# Altium PCB QuadDeck.PcbDoc
Units mm, origin at the board's own origin, x right, y up, seen from the top; angles counter-clockwise.
Board outline 42.2 x 31.8 mm, 4 copper layers (Top Layer, VDD, GND, Bottom Layer), stack 0.604 mm thick; 31 components, 23 nets, 158 pads, 57 vias.
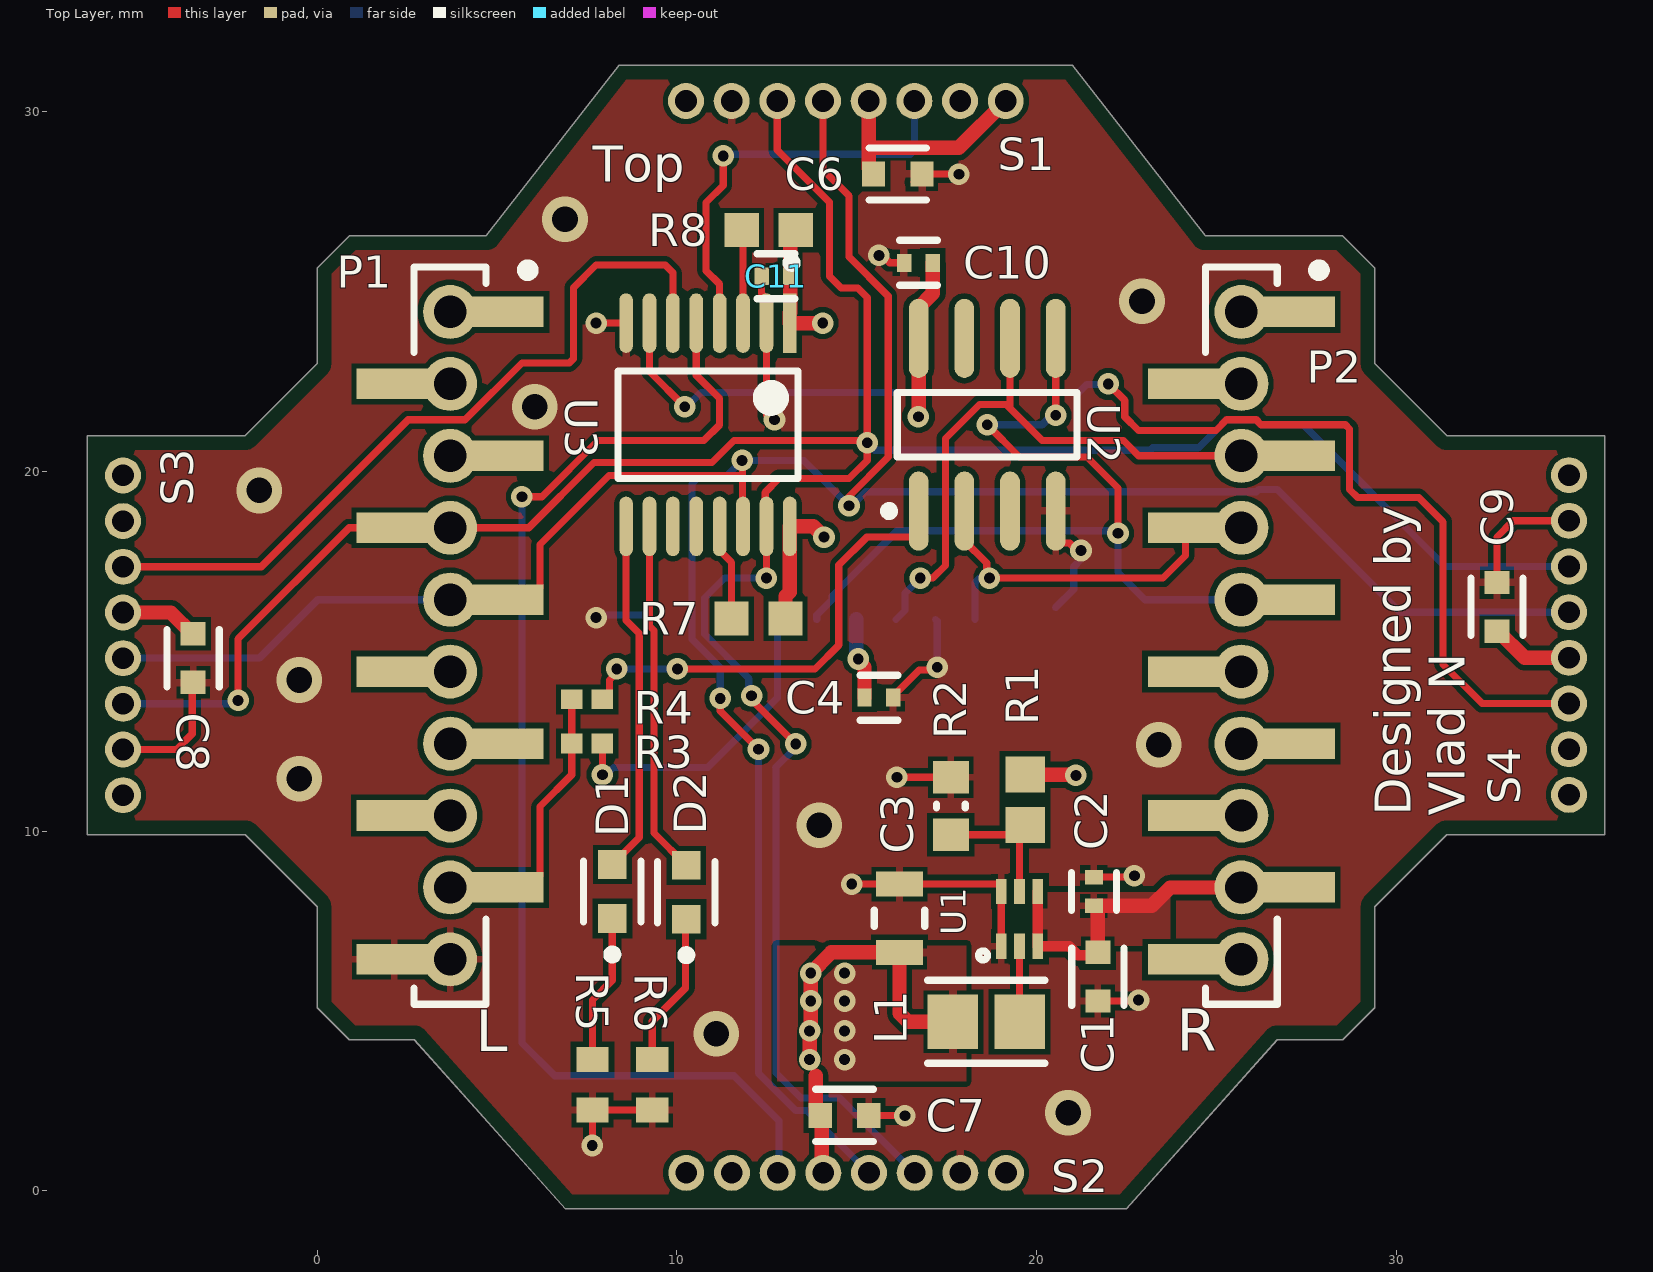
[diagram p0: Top Layer view]
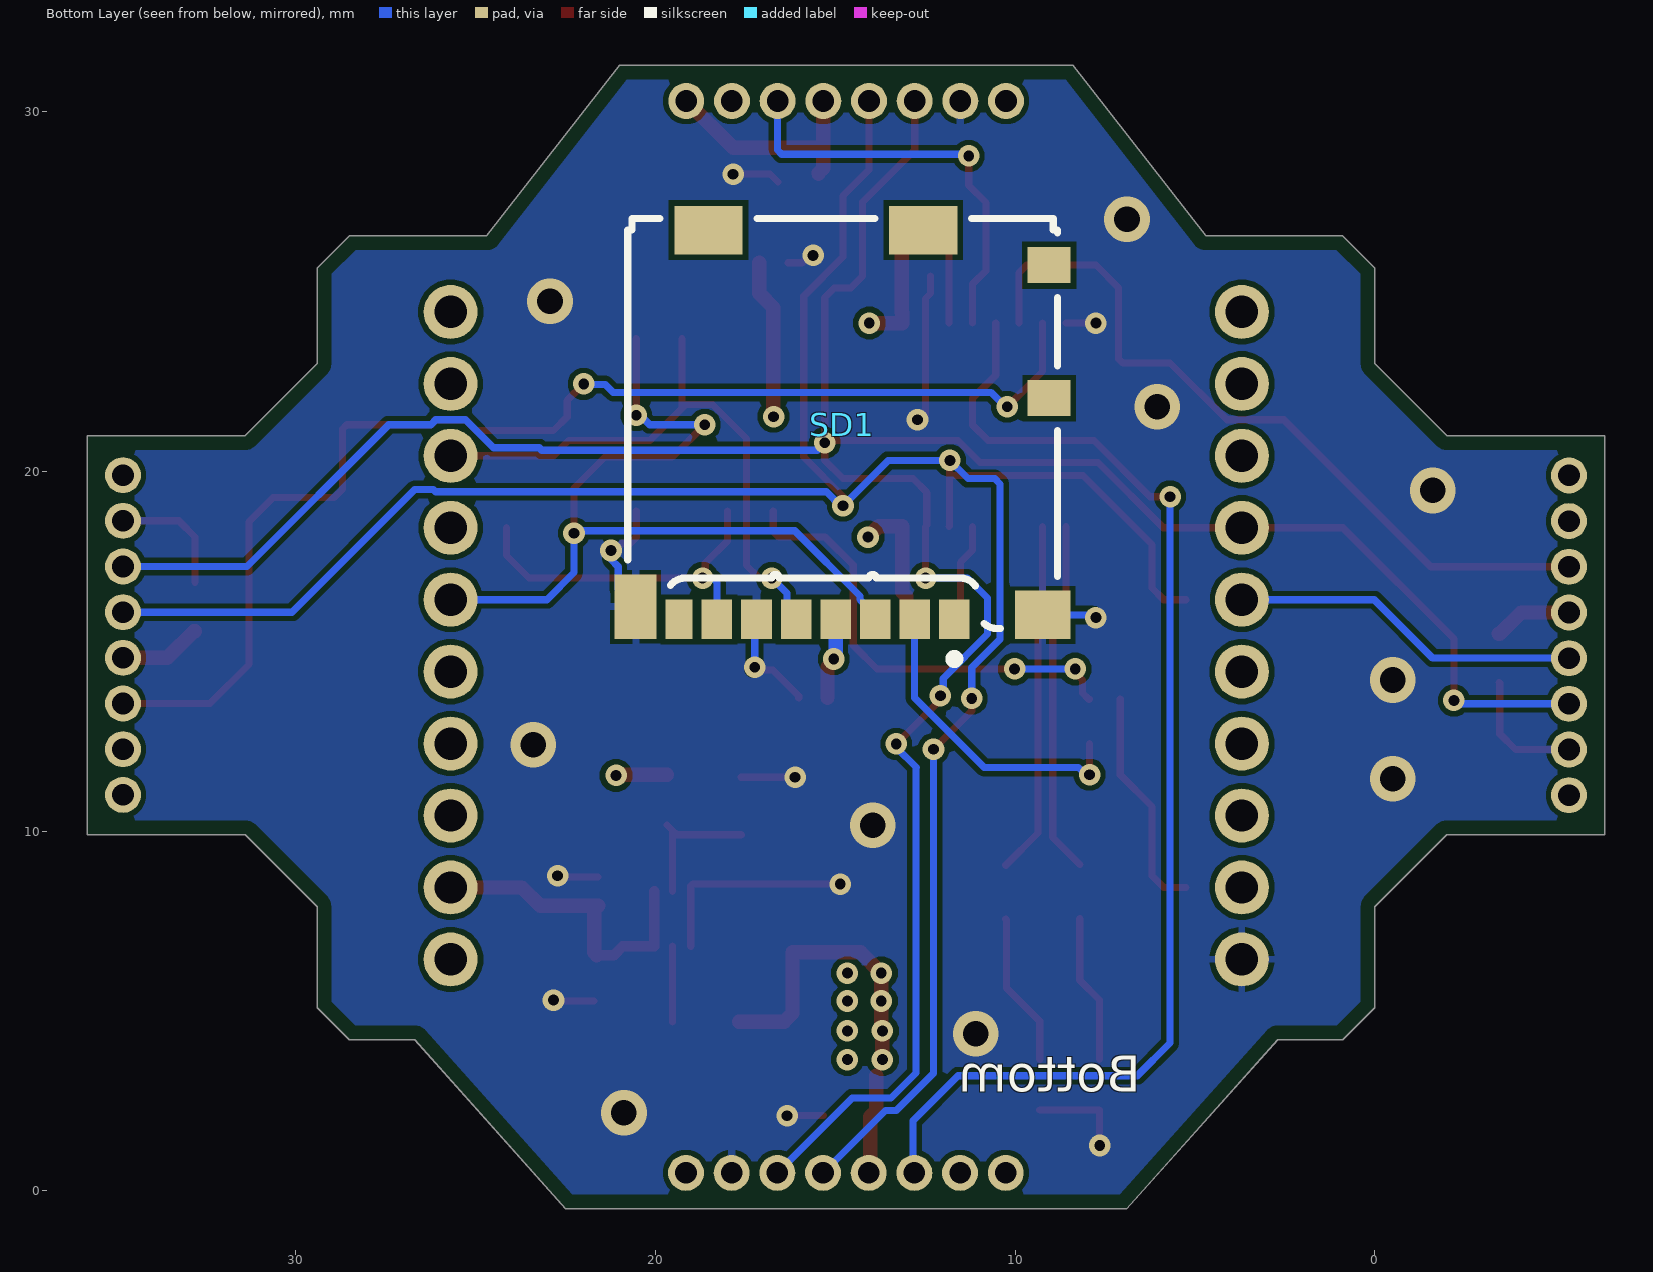
[diagram p1: Bottom Layer view, seen from below]
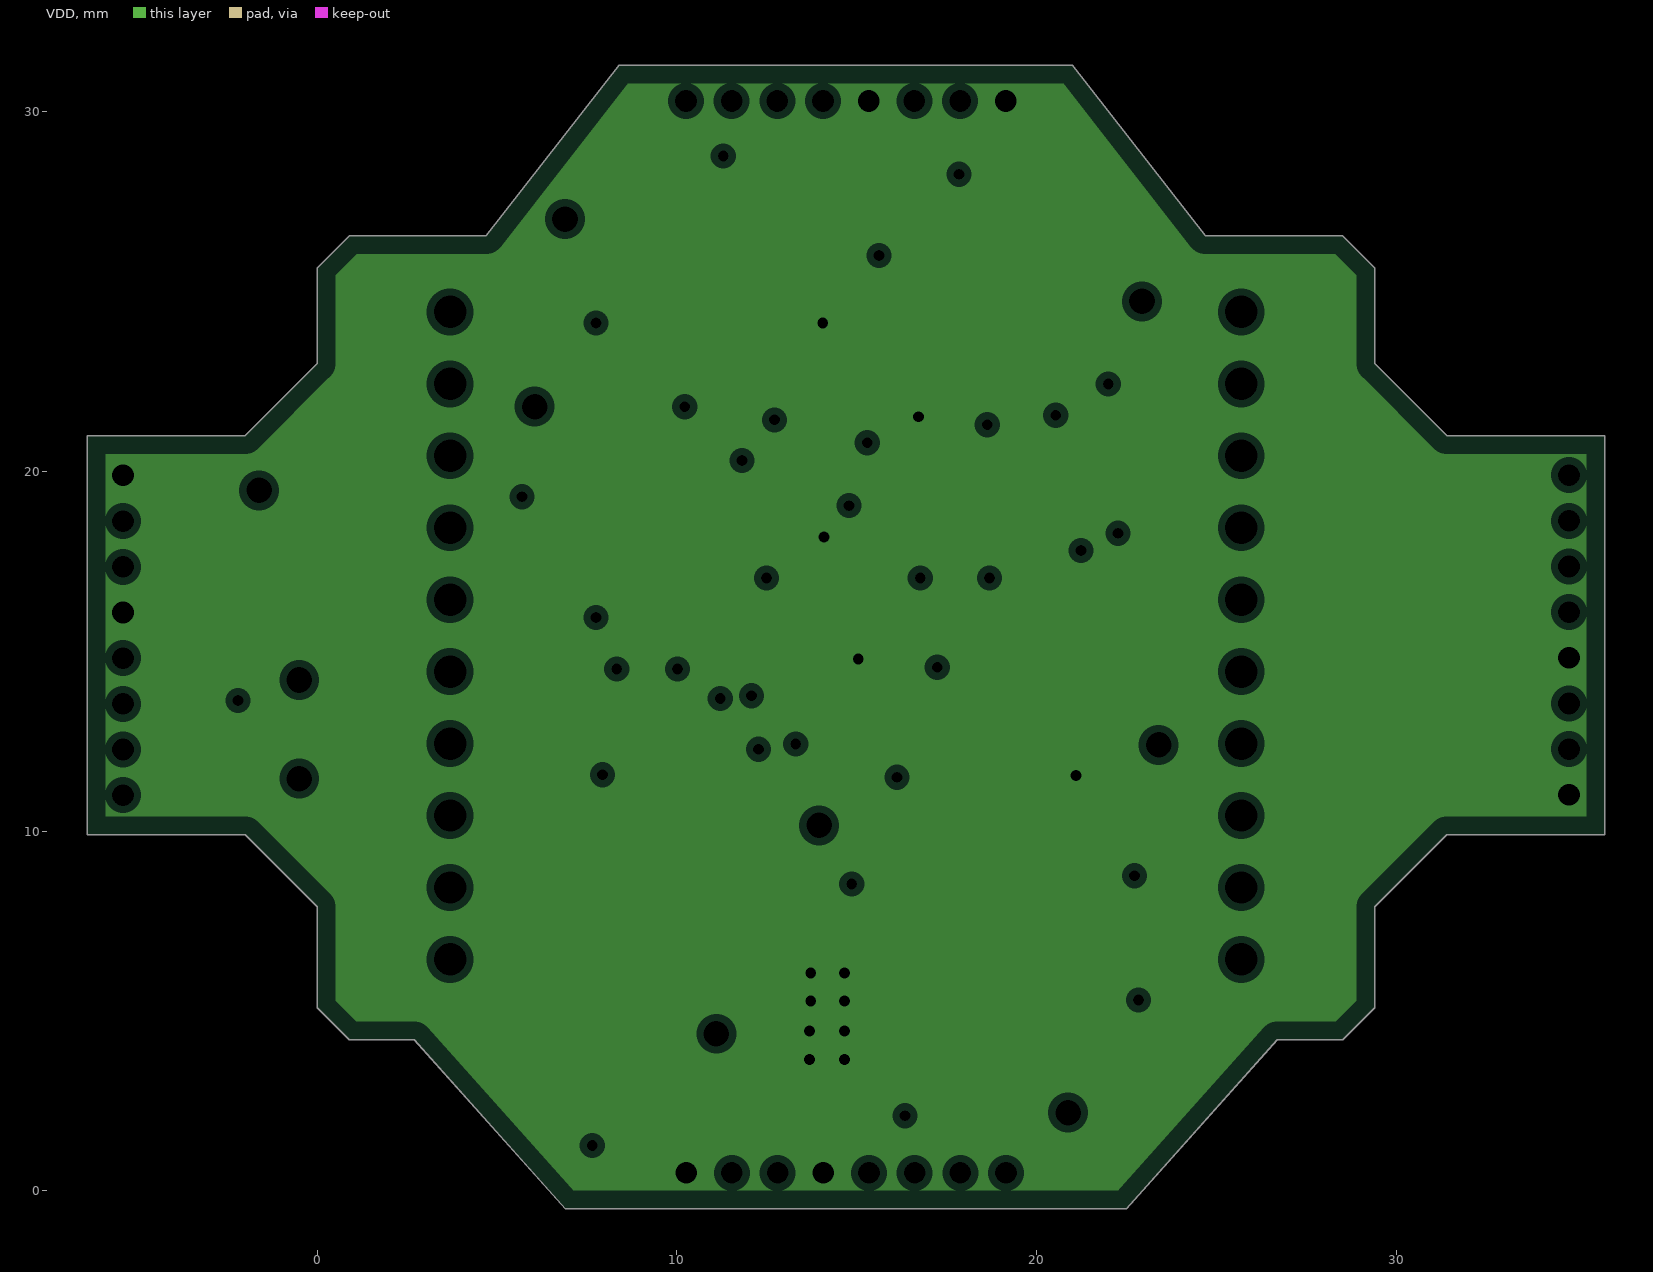
[diagram p2: VDD, clearances drawn from the general rule]
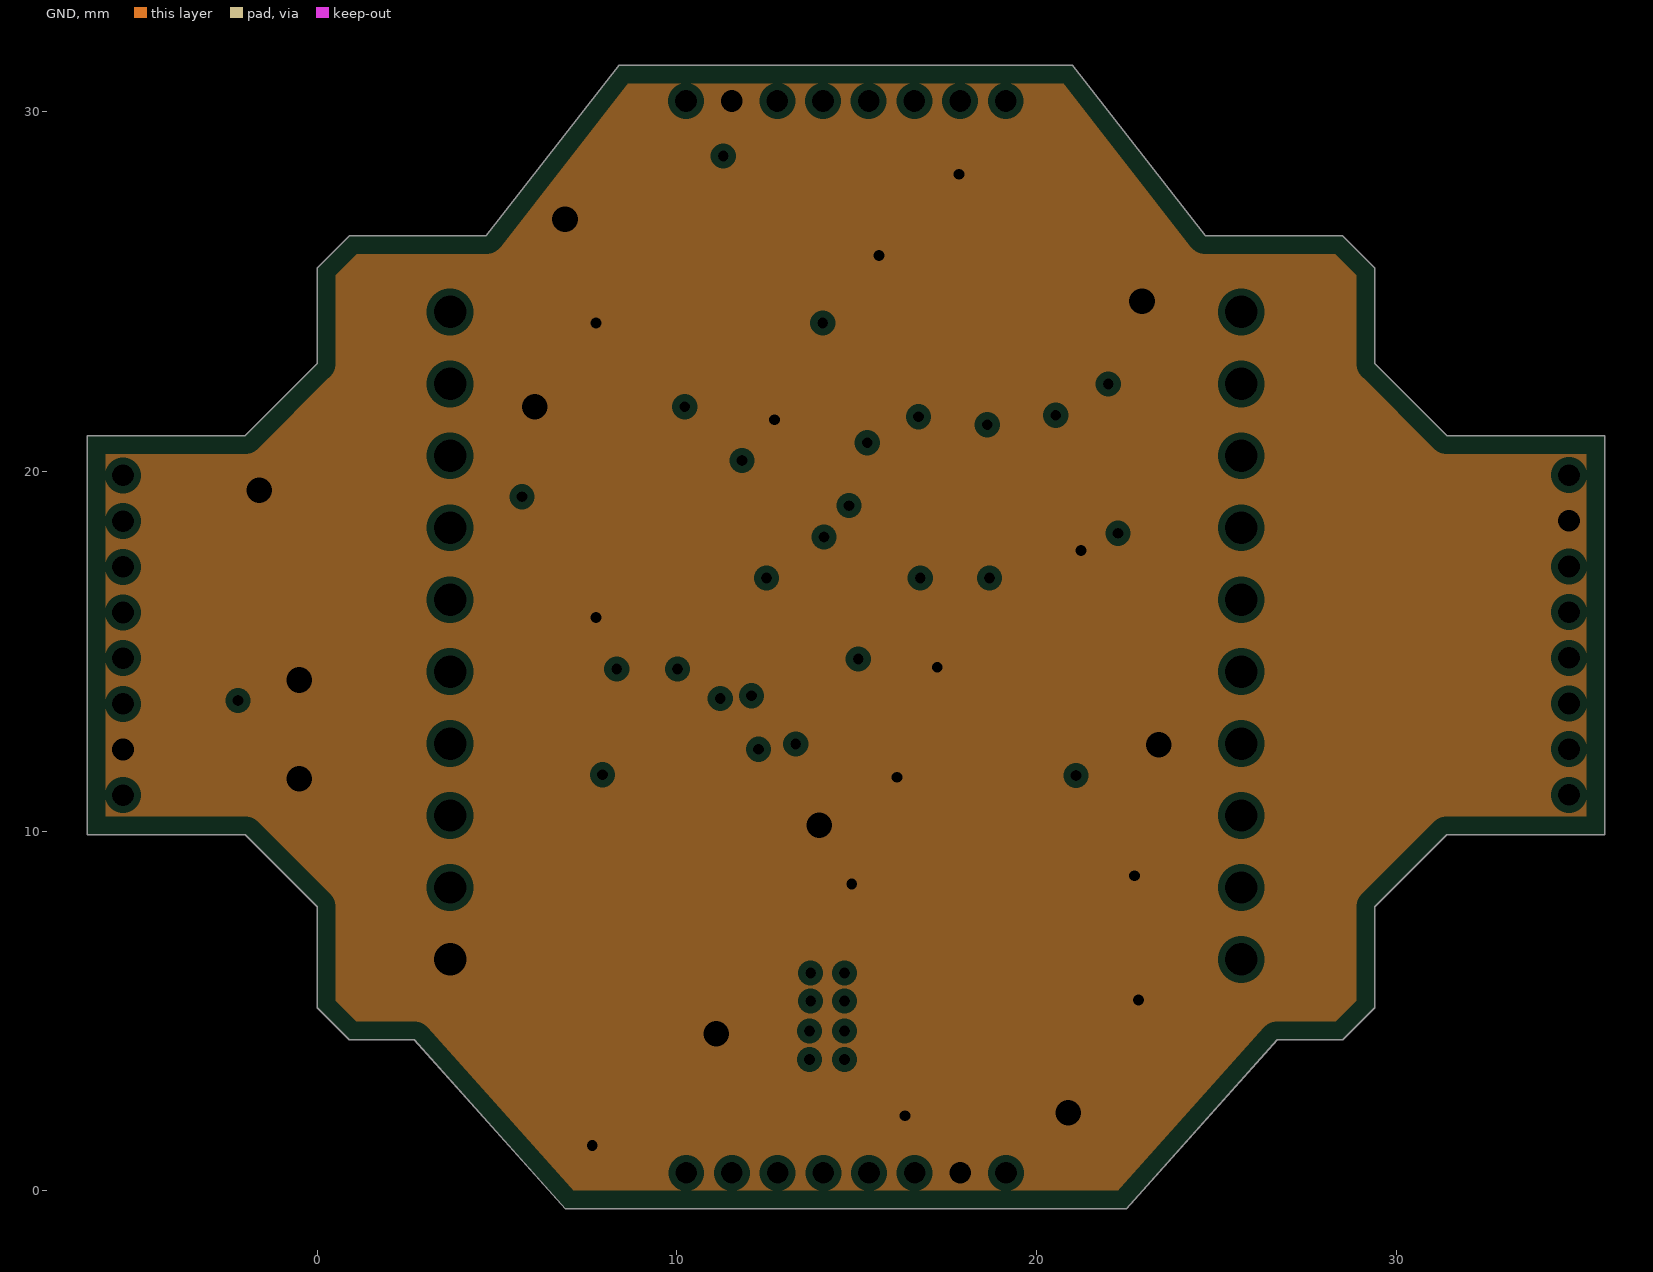
[diagram p3: GND, clearances drawn from the general rule]
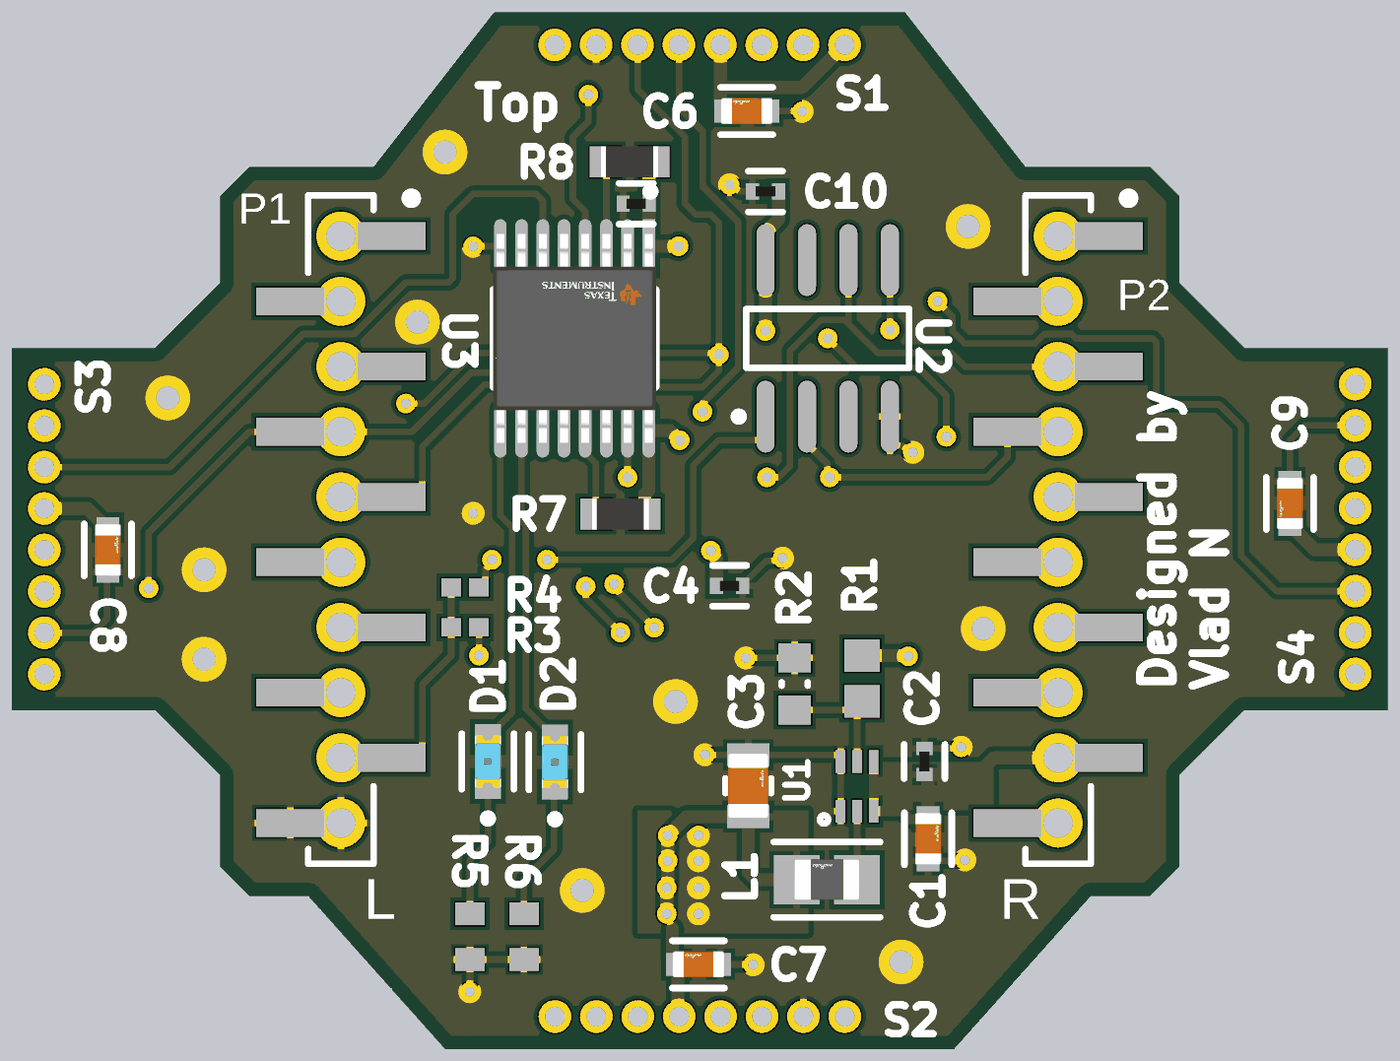
[diagram p4: 3D render of the assembled board from above, using the file's embedded part models]

## Layer stack, top to bottom
Top Solder: solder mask 0.01, Solder Resist, Dk 3.5
Top Layer: signal copper 0.036
Dielectric 2: prepreg 0.0711, PP-006, Dk 4.1
VDD: plane copper 0.035, net VDD
Dielectric 3: prepreg 0.0711, PP-006, Dk 4.1
GND: plane copper 0.035, net GND
Dielectric 1: prepreg 0.32, FR-4, Dk 4.1
Bottom Layer: signal copper 0.036
Bottom Solder: solder mask 0.01, Solder Resist, Dk 3.5

## Board outline
29.4,23 31.4,21 35.8,21 35.8,9.9 31.4,9.9 29.4,7.9 29.4,5.089 28.511,4.2 26.69,4.2 22.49,-0.5 6.9,-0.5 2.7,4.2 0.889,4.2 0,5.089 0,7.9 -2,9.9 -6.4,9.9 -6.4,21 -2,21 0,23 0,25.661 0.895,26.556 4.7,26.556 8.394,31.3 20.99,31.3 24.684,26.556 28.505,26.556 29.4,25.661

## Design rules (kind name [scope] priority, off if disabled: settings)
AcuteAngle [All] p1: minimum=6.00000000000000E+0001 checktracksonly=TRUE
BoardOutlineClearance [All] p1: gap=0 ignorepadtopadclearanceinfootprint=FALSE except(0.4: Poly-OutlineEdge)
Clearance [All] p1: gap=0.15 ignorepadtopadclearanceinfootprint=FALSE
ComponentClearance ComponentClearance_moreweirdtphole [InComponent('TP27') vs InComponent('U2')] p1: gap=0 collisioncheckmode=3 verticalgap=0 showdistances=FALSE
ComponentClearance ComponentClearance_weird_tp_holes [InComponent('TP25') vs InComponent('TP26')] p2: gap=0 collisioncheckmode=3 verticalgap=0 showdistances=FALSE
ComponentClearance ComponentClearance_TPunderlatch [InComponent('U2') vs InComponent('TP23') or InComponent('JP21') or InComponent('JP27') or InComponent('JP24') or InComponent('JP25') or InComponent('JP26')] p3: gap=0 collisioncheckmode=3 verticalgap=0 showdistances=FALSE
ComponentClearance ComponentClearance_NetTie [InComponentClass('NetTie')] p4: gap=0 collisioncheckmode=3 verticalgap=0 showdistances=TRUE
ComponentClearance ComponentClearance_Hole [InComponentClass('Holes, Screws etc.')] p5: gap=0 collisioncheckmode=3 verticalgap=0 showdistances=TRUE
ComponentClearance [All] p6: gap=0.152 collisioncheckmode=3 verticalgap=0.152 showdistances=TRUE
DiffPairsRouting [All] p1: maxlimit=0.381 minlimit=0.125 mostfreqgap=0.125 toplayer_minwidth=0.125 toplayer_maxwidth=0.381 toplayer_prefwidth=0.3 bottomlayer_minwidth=0.125 bottomlayer_maxwidth=0.381 bottomlayer_prefwidth=0.3 maxuncoupledlength=12.7
FabricationTestpoint [All] p1: side=3 testpointundercomponent=TRUE minsize=0.5 maxsize=2.54 preferedsize=1.524 minholesize=0 maxholesize=1.016 preferedholesize=0.813 testpointgrid=0.025 allowsidetop=TRUE allowsidebottom=TRUE usegrid=TRUE gridtolerance=0
FanoutControl Fanout_BGA_1 [InComponent('U1')] p1: bgadir=Out bgaviamode=Centered fanoutstyle=BGA fanoutdirection=Alternating viagrid=0.025 // Fanout_BGA (Default Rule)
FanoutControl Fanout_BGA [IsBGA] p2: bgadir=Out bgaviamode=Centered fanoutstyle=Auto fanoutdirection=Alternating viagrid=0.025 // Fanout_BGA (Default Rule)
FanoutControl Fanout_LCC [IsLCC] p3: bgadir=Out bgaviamode=Centered fanoutstyle=Auto fanoutdirection=Alternating viagrid=0.025 // Fanout_LCC (Default Rule)
FanoutControl Fanout_SOIC [IsSOIC] p4: bgadir=Out bgaviamode=Centered fanoutstyle=Auto fanoutdirection=Alternating viagrid=0.025 // Fanout_SOIC (Default Rule)
FanoutControl Fanout_Small [(CompPinCount < 5)] p5: bgadir=Out bgaviamode=Centered fanoutstyle=Auto fanoutdirection=OutThenIn viagrid=0.025 // Fanout_Small (Default Rule)
FanoutControl Fanout_Default [All] p6: bgadir=Out bgaviamode=Centered fanoutstyle=Auto fanoutdirection=Alternating viagrid=0.025 // Fanout_Default (Default Rule)
Height [All] p1: minheight=0 maxheight=50 prefheight=12.7
HoleSize [All] p1: absolutevalues=TRUE maxlimit=5 minlimit=0.3 maxpercent=80.000 minpercent=20.000
HoleToHoleClearance [All] p1: gap=0.25 allowstackedmicrovias=FALSE
Length "InNet('CLK_0') Or InNet('CLK_1')" [InNet('CLK_0') Or InNet('CLK_1')] p1: maxlimit=36.773 minlimit=0
MinimumAnnularRing MinimumAnnularRing_Vias_bga [Isvia and TouchesRoom('GAP')] p1: minimumring=0.1
MinimumAnnularRing MinimumAnnularRing_Vias [Isvia] p2: minimumring=0.124
MinimumAnnularRing [All] p3: minimumring=0.15
MinimumSolderMaskSliver [All] p1: minsoldermaskwidth=0.07
PlaneClearance "Mounting Holes" [InPadClass('ExtendedClearance')] p1: clearance=2.1
PlaneClearance [All] p2: clearance=0.2
PlaneConnect [All] p1: planeconnectstyle=Direct reliefexpansion=0.508 reliefentries=4 reliefconductorwidth=0.254 reliefairgap=0.254
PolygonConnect [All] p1: thpad.connectstyle=Relief thpad.reliefconductorwidth=0.2 thpad.reliefentries=4 thpad.polygonreliefangle="90 Angle" thpad.airgapwidth=0.15 smdpad.connectstyle=Relief smdpad.reliefconductorwidth=0.2 smdpad.reliefentries=4 smdpad.polygonreliefangle="90 Angle" smdpad.airgapwidth=0.125 via.connectstyle=Direct via.reliefconductorwidth=0.2 via.reliefentries=4 via.polygonreliefangle="45 Angle" via.airgapwidth=0.125
RoutingVias [All] p1: holewidth=0.3 width=0.6 viastyle="Through Hole" minholewidth=0.3 minwidth=0.6 maxholewidth=10 maxwidth=15
ShortCircuit ShortCircuit_variant_footprint [IsPad and not InAnyNet vs IsPad and not InAnyNet] p1: allowed=TRUE
ShortCircuit [All] p2: allowed=FALSE
SilkToSilkClearance "SilkText Exception" [OnSilkscreen  And (IsText And Not IsDesignator) vs OnSilkscreen  And ((IsText And Not IsDesignator) or IsTrack)] p1: silktosilkclearance=0
SilkToSilkClearance [All] p2: silktosilkclearance=0.01
SilkToSolderMaskClearance [IsPad] p1: minsilkscreentomaskgap=0.01 clearancetoexposedcopper=TRUE
SolderMaskExpansion [All] p1: expansion=0.05 istentingtop=FALSE
Width Width_2 [InNet('VCOM')] p1: maxlimit=0.4 minlimit=0.3 preferedwidth=0.4
Width Width_1 [InNet('VDD')] p2: maxlimit=0.4 minlimit=0.4 preferedwidth=0.4
Width [All] p3: maxlimit=0.2 minlimit=0.2 preferedwidth=0.2
13 further rules are at their usual default settings.

## Components (designator, comment, footprint, x,y, rotation, side; value= is the part's Value field where it differs from the comment)
C1 "4.7uF" FP-GRM188-0_1-MFG 21.702,5.954 r90 top
C2 "100nF" FP-GRM15-MFG 21.592,8.324 r270 top value=0.10μF
C3 "22uF" FP-GRM21B-0_15-MFG 16.187,7.579 r90 top
C4 "100nF" FP-GRM15-MFG 15.614,13.711 r180 top value=0.10μF
C6 "4.7uF" FP-GRM188-0_1-MFG 16.139,28.272 r180 top
C7 "4.7uF" FP-GRM188-0_1-MFG 14.66,2.1 r180 top
C8 "4.7uF" FP-GRM188-0_1-MFG -3.45,14.811 r90 top
C9 "4.7uF" FP-GRM188-0_1-MFG 32.8,16.238 r270 top
C10 "100nF" FP-GRM15-MFG 16.714,25.803 r0 top value=0.10μF
C11 "100nF" FP-GRM15-MFG 12.752,25.428 r0 top value=0.10μF
D1 "LTST-C191TBKT" FP-LTST-C191TBKT-MFG 8.203,8.324 r90 top
D2 "LTST-C191TBKT" FP-LTST-C191TBKT-MFG 10.259,8.302 r90 top
L1 "1uH 1.6A" FP-LQM21PN_EH-w1_5-IPC_A 18.599,4.7 r180 top
P1 "L" PCBComponent_1 3.596,14.104 r0 top locked
P2 "R" PCBComponent_1 25.592,14.104 r0 top locked
R1 "100k" RESC1608X55X30ML20T20 19.678,10.87 r90 top
R2 "24k" RESC0603(1608)_N 17.613,10.7 r270 top value="24000.00 Ohm"
R3 "0R" RESC1005X40X25NL05T10 7.502,12.436 r180 top
R4 "0R" RESC1005X40X25NL05T10 7.502,13.666 r180 top
R5 "330R" RESC1608X55X25NL10T15 7.652,2.95 r270 top
R6 "330R" RESC1608X55X25NL10T15 9.312,2.95 r270 top
R7 "47K" RESC1608X55X30NL15T15 12.267,15.911 r0 top
R8 "47K" RESC1608X55X30NL15T15 12.552,26.713 r0 top
S1 "Header 8" tof-connector 14.95,30.3 r0 top locked
S2 "Header 8" tof-connector 14.45,0.5 r180 top locked
S3 "Header 8" tof-connector -5.4,15.7 r90 top locked
S4 "Header 8" tof-connector 34.8,15.2 r270 top locked
SD1 "104031-0811" MOLX-104031-0811_V 14.8,21.3 r180 bottom
U1 "TPS62A0x" SOT50P245X110-6N 19.525,7.562 r90 top
U2 "N25Q032A13ESC40F" MICT-SC-8_N 18.625,21.3 r90 top
U3 "TCA6408AQPWRQ1" FP-PW0016A-IPC_B 10.862,21.3 r270 top

## Footprints (in the part's own frame and the unit in brackets; to place one, negate y for a bottom-side part, rotate by r counter-clockwise, add the part's x,y. Pads: shape width x height; smd on the part's side, far side on the other; paste and mask are expansions set on the pad)
FP-GRM15-MFG [mm]
  rect 0.4x0.5 smd paste+0 mask+0: 1(-0.4,0) 2(0.4,0)
  silkscreen extent -0.53,-0.63 0.53,0.63, body extent -0.7,-0.38 0.7,0.38, height 0.25
FP-GRM21B-0_15-MFG [mm]
  rect 0.7x1.3 smd paste+0 mask+0: 1(-0.95,0) 2(0.95,0)
  silkscreen extent -0.23,-0.7 0.23,0.7, body extent -1.4,-0.8 1.4,0.8, height 0.25
FP-GRM188-0_1-MFG [mm]
  rect 0.65x0.7 smd paste+0 mask+0: 1(-0.675,0) 2(0.675,0)
  silkscreen extent -0.8,-0.72 0.8,0.72, body extent -1.1,-0.55 1.1,0.55, height 0.25
FP-LQM21PN_EH-w1_5-IPC_A [mm]
  rect 1.406x1.508 smd paste+0 mask+0: 1(-0.926,0) 2(0.926,0)
  silkscreen extent -1.63,-1.15 1.63,1.15, body extent -2.13,-1.25 2.13,1.25, height 0.25
FP-LTST-C191TBKT-MFG [mm]
  rect 0.8x0.8 smd paste+0 mask+0: 1(-0.75,0) 2(0.75,0)
  silkscreen extent -1.87,-0.8 0.85,0.8, body extent -1.25,-0.55 1.25,0.55, height 0.25
FP-PW0016A-IPC_B [mm]
  rect 1.655x0.381 smd paste+0 mask+0: 1(-2.825,2.275)
  rrect100% 1.655x0.381 smd paste+0 mask+0: 2(-2.825,1.625) 3(-2.825,0.975) 4(-2.825,0.325) 5(-2.825,-0.325) 6(-2.825,-0.975) 7(-2.825,-1.625) 8(-2.825,-2.275) 9(2.825,-2.275) 10(2.825,-1.625) 11(2.825,-0.975) 12(2.825,-0.325) 13(2.825,0.325) 14(2.825,0.975) 15(2.825,1.625) 16(2.825,2.275)
  silkscreen extent -4.63,-2.5 1.5,2.5, body extent -3.9,-2.75 3.9,2.75, height 0.25
MICT-SC-8_N [mm] "SOIC, 8-Leads, Body 5x4mm, Pitch 1.27mm, IPC Medium Density"
  oval 2.2x0.55 smd: 1(-2.4,1.905) 2(-2.4,0.635) 3(-2.4,-0.635) 4(-2.4,-1.905) 5(2.4,-1.905) 6(2.4,-0.635) 7(2.4,0.635) 8(2.4,1.905)
  silkscreen extent -2.52,-2.5 0.9,2.85, body extent -2,-2.5 2,2.5, height 0.1
MOLX-104031-0811_V [mm] "Micro SD, 8-Leads, Body 11.95x11.4mm, Pitch 1.1mm"
  rect 0.85x1.1 smd: 1(3.113,-5.412) 2(2.013,-5.412) 3(0.913,-5.412) 4(-0.188,-5.412) 5(-1.288,-5.412) 6(-2.387,-5.412) 7(-3.487,-5.412)
  rect 0.75x1.1 smd: 8(-4.537,-5.412)
  rect 1.2x1 smd: 9(5.748,0.738) 10(5.748,4.438)
  rect 1.55x1.35 smd: 11(5.573,-5.287)
  rect 1.17x1.8 smd: 12(-5.747,-5.062)
  rect 1.9x1.35 smd: 13(-3.722,5.413) 14(2.248,5.413)
  silkscreen extent -5.97,-6.64 5.98,5.74, body extent -5.97,-5.66 5.98,5.74, height 1.45
PCBComponent_1 [mm]
  round 1.5 hole 0.9: 1(0.098,10.332) 2(0.098,8.332) 3(0.098,6.332) 4(0.098,4.332) 5(0.098,2.332) 6(0.098,0.332) 7(0.098,-1.668) 8(0.098,-3.668) 9(0.098,-5.668) 10(0.098,-7.668)
  rect 2.1x0.85 smd: 1(1.648,10.332) 2(-1.452,8.332) 3(1.648,6.332) 4(-1.452,4.332) 5(1.648,2.332) 6(-1.452,0.332) 7(1.648,-1.668) 8(-1.452,-3.668) 9(1.648,-5.668) 10(-1.452,-7.668)
  silkscreen extent -0.9,-8.92 2.41,11.64, body extent -0.9,-8.92 1.1,11.58, height 3
RESC0603(1608)_N [mm] "Chip Resistor, Body 1.6x0.8mm, IPC Medium Density"
  rect 0.9x1 smd: 1(-0.8,0) 2(0.8,0)
  silkscreen extent -0.05,-0.4 0.05,0.4, body extent -0.85,-0.47 0.85,0.47, height 0.6
RESC1005X40X25NL05T10 [mm] "Chip Resistor, 2-Leads, Body 1.00x0.50mm, IPC Medium Density"
  rect 0.6x0.55 smd: 1(-0.425,0) 2(0.425,0)
  body extent -0.53,-0.27 0.53,0.28, height 0.4
RESC1608X55X25NL10T15 [mm] "Chip Resistor, 2-Leads, Body 1.70x0.90mm, IPC Medium Density"
  rect 0.7x0.9 smd: 1(-0.7,0) 2(0.7,0)
  body extent -0.85,-0.45 0.85,0.45, height 0.55
RESC1608X55X30ML20T20 [mm] "Chip Resistor, 2-Leads, Body 1.60x0.80mm, IPC Low Density"
  rect 1x1.1 smd: 1(-0.7,0) 2(0.7,0)
  body extent -0.9,-0.5 0.9,0.5, height 0.55
RESC1608X55X30NL15T15 [mm] "Chip Resistor, 2-Leads, Body 1.75x0.95mm, IPC Medium Density"
  rect 0.95x0.95 smd: 1(-0.75,0) 2(0.75,0)
  body extent -0.87,-0.48 0.87,0.48, height 0.55
SOT50P245X110-6N [mm] "SOT23, 6-Leads, Body 1.80x2.45mm, Pitch 0.50mm, IPC Medium Density"
  rect 0.7x0.3 smd: 1(-0.762,0.508) 2(-0.762,0) 3(-0.762,-0.508) 4(0.762,-0.508) 5(0.762,0) 6(0.762,0.508)
  silkscreen extent -1.14,0.89 -0.89,1.14, body extent -0.74,-0.9 0.74,0.9, height 1.1
tof-connector [mm]
  round 1 hole 0.6: 1(-4.699,0) 2(-3.429,0) 3(-2.159,0) 4(-0.889,0) 5(0.381,0) 6(1.651,0) 7(2.921,0) 8(4.191,0)

## Part data
C1 C6 C7 C8 C9: library part CMP-2006-02799-3, "CAP CER 4.7UF 6.3V X5R 0603", Case Code (Imperial)=0603, Case Code (Metric)=1608, Dielectric=X5R, Max Operating Temperature=85°C, Min Operating Temperature=-55°C, Package Quantity=1, Tolerance=10%, Voltage=6.3V, Capacitance=4.7uF, Case/Package=0603, Depth=0.8mm, Height=0.8mm, Lead Free="Lead Free", Length=1.6mm, Material=Ceramic, Mount="Surface Mount", Packaging="Tape and Reel", Radiation Hardening=No, REACH SVHC="No SVHC", RoHS Compliant=Yes, Termination=SMD/SMT, Thickness=0.035inch, Voltage Rating=6.3V, Voltage Rating (DC)=6.3V, Width=0.8mm
C2 C4 C10 C11: library part CMP-2100-03641-2, "CAP CER 0.1UF 16V X7R 0402", Capacitance=0.10μF, Manufacturer=Murata, Manufacturer Part Number=GRM155R71C104KA88D, Package=GRM15, Temperature="-55°C to +125°C", Temperature Characteristic=X7R, Temperature Range High=+125°C, Temperature Range Low=-55°C, Tolerance=10%, Voltage Rating=16Vdc, Category=Cap, ComponentLink2Description=Datasheet, ComponentLink2URL=https://search.murata.co.jp/Ceramy/image/img/A01X/G101/ENG/GRM155R71H471KA01-01A.pdf, Device Class L1="Passive Components", Device Class L2=Capacitors, Device Class L3="Ceramic Capacitors", Digikey Description="CAP CER 0.1UF 16V X7R 0402", Height=0.55mm, Ipc Land Pattern Name=CAPC10050X219, Lead Free=yes, Material=Ceramic, Mouser Description="0402 0.1 uF 16V ±10 % Tolerance X7R SMT Multilayer Ceramic Capacitor", Octopart=https://octopart.com/grm155r71c104ka88d-murata-196880, RoHS=TRUE, Standoff Height=0mm
C3: library part CMP-2007-03385-2, "Chip Multilayer Ceramic Capacitors for General Purpose, 0805, 22uF, X5R, 15%, 20%, 6.3V", Case Code (Imperial)=0805, Case Code (Metric)=2012, Dielectric=X5R, Max Operating Temperature=85°C, Min Operating Temperature=-55°C, Package Quantity=1, Tolerance=20%, Voltage=6.3V, Capacitance=22uF, Case/Package=0805, Depth=1.25mm, Height=1.25mm, Lead Free="Lead Free", Length=2mm, Material=Ceramic, Mount="Surface Mount", Packaging="Tape and Reel", Radiation Hardening=No, REACH SVHC="No SVHC", Termination=SMD/SMT, Thickness=0.053inch, Voltage Rating=6.3V, Voltage Rating (DC)=6.3V, Width=0.049inch
D1 D2: library part CMP-22017-000008-1, "LED BLUE CLEAR CHIP SMD", Case Code (Imperial)=0603, Case Code (Metric)=1608, Color=Blue, Forward Current=20mA, Forward Voltage=3.8V, Lens Color=Colorless, Max Operating Temperature=80°C, Max Power Dissipation=75mW, Min Operating Temperature=-20°C, Package Quantity=1, Power Dissipation=76mW, Reverse Voltage=5V, Case/Package=0603, Depth=1.6mm, Dominant Wavelength=475nm, Height=0.55mm, Illumination Color=Blue, Lead Free="Lead Free", Length=0.8mm, Lens Style=Diffused, Lens Transparency=Clear, Luminous Intensity=180mcd, Mount="Surface Mount", Number of Elements=1, Number of LEDs=1, Number of Pins=2, Packaging="Tape and Reel", Radiation Hardening=No, Test Current=20mA, Viewing Angle=130°, Wavelength=468nm, Width=0.8mm
L1: library part CMP-06042-012339-2, "FIXED IND 1UH 1.6A 107 MOHM SMD", Case Code (Imperial)=0805, Case Code (Metric)=2012, Current Rating=1.6A, DC Resistance (DCR)=107mR, Inductance=1uH, Max Operating Temperature=85°C, Min Operating Temperature=-40°C, Saturation Current=1A, Self Resonant Frequency=50MHz, Test Frequency=1MHz, Tolerance=20%, Case/Package=0805, Core Material=Ferrite, Mount="Surface Mount", Packaging="Tape and Reel", RoHS Compliant=Yes, Shielding=Shielded
P1 P2: library part MHDR1X10, "Header, 10-Pin", LatestRevisionDate=17-Jul-2002, LatestRevisionNote="Re-released for DXP Platform.", Publisher="Altium Limited"
R1: library part CMP-2000-00875-1, Manufacturer=Panasonic, Part Number=ERA3AEB104V
R2: library part CMP-1012-00107-1, "24K 0.1W 5% 0603 (1608 Metric)  SMD", Case-EIA=0603, Case-Metric=1608, Power="0.1 W", Tolerance="5 %", Technology=SMT
R3 R4: library part CMP-1011-00001-2, Manufacturer="Yageo / Phycomp", Part Number=RC0402JR-070RL
R5 R6: library part CMP-1659-00020-2, "Chip Resistor, 330 Ohm, +/- 1%, 0.1 W, -55 to 155 degC, 0603 (1608 Metric), RoHS, Tape and Reel", Capacitance="47 uF", Case Code (Imperial)=2917, Case Code (Metric)=7343, Max Operating Temperature=125degC, Min Operating Temperature=-55degC, Package Quantity=500, Tolerance=10%, Voltage Rating="16 V", Case/Package=2917, ComponentLink1Description="Manufacturer URL", ComponentLink1URL=http://www.yageo.com/, ComponentLink2Description=Datasheet, ComponentLink2URL=http://www.yageo.com/documents/recent/PYu-RC_Group_51_RoHS_L_04.pdf, DatasheetVersion="Rev. 4, 02/2016", ESR="800 mohm", Height="3.1 mm", Length="7.3 mm", Mount="Surface Mount", PackageDescription="2-Pin Surface Mount Device, Body 1.6 x 0.8 mm", PackageReference=0603, Packaging="Tape and Reel", Pins=2, Radiation Hardening=No, REACH SVHC="No SVHC", RoHSCompliant=True, Voltage Rating (DC)="16 V", Width="4.3 mm"
R7 R8: library part CMP-2000-00523-2, "Chip Resistor, 47 KOhm, +/- 1%, 0.1 W, -55 to 155 degC, 0603 (1608 Metric), RoHS, Tape and Reel", Case Code (Imperial)=0603, Case Code (Metric)=1608, Colour=Red, Forward Current="20 mA", Forward Voltage="2.1 V", Max Operating Temperature="100 degC", Min Operating Temperature="-40 degC", Package Quantity=3000, Power Rating="90 mW", Case\Package=0603, ComponentLink1Description="Manufacturer URL", ComponentLink1URL=http://www.panasonic.com/, ComponentLink2Description=Datasheet, ComponentLink2URL=http://industrial.panasonic.com/cdbs/www-data/pdf/RDA0000/AOA0000C86.pdf, DatasheetVersion=Apr-15, Height="0.6 mm", Illumination Colour=Red, Length="1.6 mm", Lens Style=Clear, Luminous Intensity="63 mcd", Mount="Surface Mount", Nominal Vf="2.1 V", Nominal Wavelength="639 nm", PackageDescription="2-Pin Surface Mount Device, Body 1.6 x 0.85 mm", PackageReference=0603, Packaging="Tape and Reel", Pins=2, Radiation Hardening=No, REACH SVHC="No SVHC", RoHSCompliant=true, Viewing Angle="160 degrees", Width="0.8 mm"
S1 S2 S3 S4: "Header, 8-Pin", LatestRevisionDate=17-Jul-2002, LatestRevisionNote="Re-released for DXP Platform.", Publisher="Altium Limited"
SD1: library part CMP-2000-05825-1, "Micro SD Card, RA, -25 to 85 degC, 8-Pin SMD, RoHS, Tape and Reel", Current Rating=500mA, Manufacturer=Molex, Package Description="8-Pin Surface Mount Device, Body 11.95 x 11.4 mm, Pitch 1.1 mm", Voltage Rating=10VAC/DC, Brand=Molex, Card Type=microSD, Contact Material=PhosphorBronze, Contact Plating=Gold, Datasheet URL=http://www.molex.com/pdm_docs/sd/1040310811_sd.pdf, Datasheet Version="Rev. E, 04/2006", Height=1.42mm, Housing Material=LiquidCrystalPolymer(LCP), Insertion - Extraction Style=Push-Pull, Length=11.4mm, Manufacturer URL=http://www.molex.com/, Mating Cycles=10000, Mounting Technology=SurfaceMount, Mounting Type=Standard, Number of Contacts=8, Number of Rows=1Row, Orientation=RightAngle, Package Reference=104031-0811, Packaging=Reel, Pitch=1.1mm, Product=CardConnectors, Product Category=MemoryCardConnectors, RoHS=True, Series=104031, Termination Style=SMD
U1: library part TPS62A01
U2: library part CMP-0357-00152-1, "32 Mb (x1/x2/x4) Serial NOR Flash Memory with Multi I/O, 108 MHz, 2.7 to 3.6 V, 8-pin SO8 Narrow (SC), Tape & Reel", Manufacturer=Micron, Package="SO8 NarrowÂ", Voltage=2.7V-3.6VÂ, Applications=EmbeddedÂ, ComponentLink1Description="Manufacturer URL", ComponentLink1URL=http://www.micron.com/, ComponentLink2Description=Datasheet, ComponentLink2URL=http://www.micron.com/~/media/Documents/Products/Data%20Sheet/NOR%20Flash/Serial%20NOR/N25Q/n25q_32mb_3v_65nm.pdf, ComponentLink3Description="Package Specification", ComponentLink3URL=http://www.micron.com/~/media/Documents/Products/Data%20Sheet/NOR%20Flash/Serial%20NOR/N25Q/n25q_32mb_3v_65nm.pdf, DatasheetVersion="Rev. G", Density=32MbÂ, Mounting Technology="Surface Mount", PackageDescription="8-Pin SO Narrow, 3.9 X 4.9 mm, Pitch 1.27 mm", PackageReference=MICT-SC-8, PackageVersion="Rev. E", Part Family=N25QÂ, Part Status=ProductionÂ, PartNumber=N25Q032A13ESC40F, RoHS=YesÂ, Speed="108 MHzÂ", Type="Multi I/OÂ", Width=x1/x2/x4Â
U3: library part CMP-04886-000007-1, "IC I/O EXPANDER I2C 8B 16TSSOP", Case/Package=TSSOP, Max Operating Temperature=125°C, Min Operating Temperature=-40°C, Lead Free="Lead Free", Number of I/Os=8, RoHS Compliant=Yes

## Via types
v1: diameter 0.6, hole 0.3, Top Layer to Bottom Layer, 47 vias
v2: diameter 1.27, hole 0.711, Top Layer to Bottom Layer, 10 vias

## Nets (pads, with @x,y where several pads share a name; then routed paths per layer and width w, separated by ;. In a path a pad name is that pad's centre, name@x,y a point inside that pad or via, vN(x,y) a via of type N, cw(c..) or ccw(c..) an arc to the next point about the centre after c; other vN are vias at no path point)
\INT: R7.1 U3.13 | length 2.7
  Top Layer w0.2: U3.13 11.187,17.804 11.517,17.474 R7.1
\RESET: R8.1 U3.3 | length 2.6
  Top Layer w0.2: R8.1 11.837,26.678 U3.3
CS: P1.9 R3.2 R4.2 | length 6.4
  Top Layer w0.2: P1.9@5.244,8.436 5.869,8.436 6.194,8.761 6.194,10.684 7.077,11.568 R3.2 R4.2
CSa: R3.1 SD1.2 | length 8.8
  Top Layer w0.2: v1(7.928,11.57) R3.1
  Bottom Layer w0.2: v1(7.928,11.57) 8.036,11.57 8.236,11.77 10.858,11.77 12.799,13.711 12.799,15.876 SD1.2
CSb: R4.1 U2.1 | length 12.9
  Top Layer w0.2: R4.1 7.952,13.666 8.127,13.841 8.127,14.203 8.328,14.403 v1(8.328,14.511) ; v1(10.012,14.511) 13.837,14.511 14.498,15.172 14.498,17.397 15.277,18.175 16.559,18.175 16.72,18.337 U2.1
  Bottom Layer w0.2: v1(8.328,14.511) v1(10.012,14.511)
GND: C1.1 C2.1 C3.2 C4.1 C6.1 C7.1 C8.1 C9.1 C10.1 C11.1 P1.10 R2.1 R5.2 R6.2 S1.2 S2.2 S3.2 S4.2 SD1.6 SD1.11 SD1.12 U1.1 U1.6 U2.4 U3.2 U3.8 | length 35.4
  Top Layer w0.2: S3.2 -3.915,12.271 -3.475,12.711 -3.475,14.111 C8.1 ; v1(7.648,1.262) 7.652,1.267 R5.2 R6.2 ; v1(7.753,24.125) U3.8 ; C11.1 12.352,24.946 12.487,24.812 U3.2 12.487,21.553 12.604,21.436 v1(12.712,21.436) ; v1(14.859,8.529) C3.2 18.967,8.529 19.017,8.479 U1.6 U1.1 ; C7.1 16.328,2.1 v1(16.338,2.09) ; v1(15.614,26.008) 15.712,26.008 15.916,25.803 C10.1 ; C4.1 16.014,13.761 16.735,14.482 17.163,14.482 v1(17.239,14.558) ; v1(16.114,11.5) R2.1 ; C6.1@16.589,28.047 C6.1 17.589,28.272 17.599,28.262 v1(17.838,28.262) ; U2.4 20.53,18.17 20.692,18.008 20.921,18.008 21.124,17.804 v1(21.233,17.804) ; C2.1 22.682,8.724 v1(22.719,8.761) ; C1.1 22.807,5.279 v1(22.832,5.304) ; C9.1 32.8,18.179 33.25,18.629 S4.2
  Bottom Layer w0.2: v1(7.753,15.938) 7.828,16.013 SD1.11 ; SD1.6 17.239,15.836 v1(17.239,14.558) v1@17.287,14.511 ; SD1.12@20.53,16.22 SD1.12 21.033,16.723 21.033,17.35 21.233,17.55 v1(21.233,17.804)
  other v2: 20.874,2.176 11.096,4.369 13.956,10.163 -0.5,11.46 23.394,12.4 -0.5,14.203 -1.614,19.473 6.045,21.801 22.929,24.732 6.887,27.013
LED0: D1.2 U3.9 | length 9.9
  Top Layer w0.2: D1.2 8.95,9.822 8.95,15.5 8.587,15.863 U3.9
LED1: D2.2 U3.10 | length 9.8
  Top Layer w0.2: U3.10 9.237,15.708 9.362,15.583 9.362,9.949 D2.2
LPn_0: S1.6 U3.4 | length 11.7
  Top Layer w0.2: U3.4 11.187,25.203 10.809,25.581 10.809,27.475 11.287,27.954 v1(11.287,28.772)
  Bottom Layer w0.2: v1(11.287,28.772) 11.337,28.822 16.484,28.822 16.601,28.94 S1.6
LPn_1: S2.6 U3.5 | length 34.1
  Top Layer w0.2: v1(5.69,19.3) 6.249,19.3 7.808,20.859 10.746,20.859 11.187,21.3 11.187,22.027 10.537,22.677 U3.5
  Bottom Layer w0.2: v1(5.69,19.3) 5.69,4.11 6.6,3.2 11.585,3.2 12.835,1.95 12.835,0.536 S2.6
LPn_2: S3.6 U3.6 | length 21.4
  Top Layer w0.2: S3.6 -1.556,17.351 2.529,21.436 4.108,21.436 5.69,23.018 7.006,23.018 7.123,23.135 7.123,25.108 7.753,25.738 9.678,25.738 9.887,25.528 U3.6
LPn_3: S4.6 U3.7 | length 35.1
  Top Layer w0.2: U3.7 9.237,22.782 v1(10.219,21.8) ; v1(21.992,22.436) 22.45,21.978 22.45,21.524 22.832,21.143 24.983,21.143 25.276,21.436 26.105,21.436 26.241,21.3 28.583,21.3 28.7,21.183 28.7,19.5 28.925,19.275 30.625,19.275 31.3,18.6 31.3,14.636 32.387,13.549 S4.6
  Bottom Layer w0.2: v1(10.219,21.8) 10.268,21.8 10.668,22.2 21.174,22.2 21.392,22.417 21.973,22.417 v1(21.992,22.436)
MISO: P2.4 SD1.7 U2.2 | length 10.1
  Top Layer w0.2: U2.2 17.99,18.075 18.611,17.454 18.611,17.114 v1(18.688,17.038) 23.513,17.038 24.14,17.665 P2.4@24.14,18.436
  Bottom Layer w0.2: SD1.7 18.287,16.914 18.411,17.038 v1(18.688,17.038)
MOSI: P2.5 SD1.3 U2.5 | length 24.2
  Top Layer w0.2: v1(18.625,21.3) 19.525,20.4 21.402,20.4 22.261,19.541 v1(22.261,18.283) ; v1@20.531,21.565 U2.5
  Bottom Layer w0.2: SD1.3 13.888,16.013 14.313,16.438 14.313,16.541 16.126,18.354 22.19,18.354 v1(22.261,18.283) 22.261,17.19 23.015,16.436 P2.5@25.69,16.436 ; v1(18.625,21.3) 20.158,21.3 20.423,21.564 v1(20.531,21.564)
NetD1_1: D1.1 R5.1 | length 4.2
  Top Layer w0.2: R5.1 7.652,5.304 8.203,5.854 D1.1
NetD2_1: D2.1 R6.1 | length 4.3
  Top Layer w0.2: R6.1 9.312,4.715 10.234,5.636 10.234,7.527 D2.1
NetL1_1: L1.1 U1.2 | length 2.1
  Top Layer w0.2: L1.1 U1.2
NetR1_1: R1.1 R2.2 U1.5 | length 3.9
  Top Layer w0.2: R2.2 19.407,9.9 R1.1@19.525,10.018 ; U1.5 R1.1@19.525,10.018 ; R1.1 R1.1@19.525,10.018
SCK: P2.3 SD1.5 U2.6 | length 17
  Top Layer w0.2: v1(16.762,17.038) 17.114,17.038 17.465,17.389 17.465,20.918 18.411,21.864 19.152,21.864 19.26,21.756 ; U2.6 19.26,21.756 ; P2.3@25.69,20.436 22.835,20.436 22.412,20.859 20.157,20.859 19.26,21.756
  Bottom Layer w0.2: SD1.5 16.338,16.138 16.338,16.613 v1(16.762,17.038)
SCL: P1.5 S1.4 S2.4 S3.4 S4.4 U3.14 | length 81
  Top Layer w0.2: P1.5@5.244,16.436 5.869,16.436 6.194,16.761 6.194,17.973 8.112,19.891 11.736,19.891 11.825,19.802 ; v1(11.202,13.691) 11.202,13.344 v1(12.267,12.279) ; v1@11.8,20.309 v1(11.813,20.309) 11.825,20.297 11.825,19.802 ; U3.14 11.825,18.487 11.825,19.802 ; S1.4 14.061,28.386 14.787,27.66 14.787,25.963 15.875,24.875 15.875,20.4 14.783,19.307 v1(14.783,19.05)
  Bottom Layer w0.2: S3.4 -1.614,14.811 0.011,16.436 P1.5@3.694,16.436 ; v1(11.202,13.691) 11.202,14.549 10.417,15.334 10.417,19.655 10.564,19.802 11.306,19.802 v1(11.813,20.309) 13.524,20.309 v1(14.783,19.05) 14.859,19.05 15.245,19.436 26.105,19.436 26.168,19.5 26.69,19.5 30.101,16.089 S4.4 ; v1(12.267,12.279) 12.267,3.269 13.302,2.234 13.605,2.234 S2.4
SDA: P1.4 S1.3 S2.3 S3.3 S4.3 U3.15 | length 84.7
  Top Layer w0.2: v1(-2.2,13.636) -2.2,15.347 0.889,18.436 3.694,18.436 5.88,18.436 7.694,20.25 10.976,20.25 11.585,20.859 15.23,20.859 v1(15.289,20.8) ; v1(12.074,13.764) 12.087,13.751 12.087,13.641 v1(13.302,12.426) ; v1(12.487,17.038) U3.15 12.453,18.509 12.453,19.42 12.835,19.802 14.783,19.802 15.289,20.309 v1(15.289,20.8) ; S1.3 12.791,28.938 14.241,27.488 14.241,25.427 14.565,25.103 15.024,25.103 15.289,24.838 v1(15.289,20.8)
  Bottom Layer w0.2: S3.3 -2.295,13.541 v1(-2.2,13.636) ; v1(12.074,13.764) 11.998,13.841 11.998,14.249 10.767,15.479 10.767,16.484 11.321,17.038 v1(12.487,17.038) ; v1(13.302,12.426) 13.302,12.33 12.742,11.77 12.752,11.76 12.752,3.279 13.447,2.584 14.525,2.584 S2.3 ; v1(15.289,20.8) 15.496,20.593 23.158,20.593 23.226,20.661 24.501,20.661 25.276,21.436 26.105,21.436 26.241,21.3 27.412,21.3 31.353,17.359 S4.3
VCOM: C1.2 C2.2 P2.9 U1.3 U1.4 | length 9
  Top Layer w0.3: U1.4 U1.3 20.904,6.8 21.152,6.552 C1.2@21.625,6.552
  Top Layer w0.4: C2.2 C2.2@21.642,7.924 ; C1.2@21.625,6.552 C1.2 21.702,7.864 C2.2@21.642,7.924 ; P2.9@25.69,8.436 23.712,8.436 23.2,7.924 C2.2@21.642,7.924
VDD: C3.1 C4.2 C6.2 C7.2 C8.2 C9.2 C10.2 C11.2 L1.2 R1.2 R7.2 R8.2 S1.5 S1.8 S2.5 S2.8 S3.5 S3.8 S4.5 S4.8 SD1.4 U2.8 U3.1 U3.16 | length 37.5
  Top Layer w0.4: S3.5 -4.07,16.081 -3.475,15.486 C8.2 ; R7.2 13.017,16.531 13.137,16.651 U3.16 13.788,18.475 v1(14.088,18.175) ; R8.2 13.147,26.557 13.147,24.418 13.137,24.408 U3.1 v1(14.052,24.125) ; v1(13.687,3.65) v1(13.687,4.448) 13.717,4.478 v1(13.717,5.279) v1(13.717,6.054) 14.293,6.629 C3.1 16.187,4.934 16.422,4.7 L1.2 ; 13.862,3.2 13.862,2.223 C7.2 14.027,2.058 14.027,0.542 S2.5 ; v1(15.039,14.788) 15.039,14.733 15.214,14.558 C4.2 ; S1.5 15.331,28.997 ; C6.2 15.464,28.297 15.331,28.431 15.331,28.997 ; v1(16.714,21.524) 16.72,21.53 U2.8 16.72,24.559 17.114,24.953 C10.2 ; S1.8 17.838,28.997 15.331,28.997 ; R1.2 21.072,11.57 v1(21.092,11.55) ; C9.2 32.825,15.563 33.569,14.819 S4.5
  Bottom Layer w0.4: SD1.4 14.988,14.839 v1(15.039,14.788)
  other v1: 14.66,3.65 14.66,4.448 14.66,5.279 14.66,6.054
pads on no net: P1.1 P1.2 P1.3 P1.6 P1.7 P1.8 P2.1 P2.2 P2.6 P2.7 P2.8 P2.10 S1.1 S1.7 S2.1 S2.7 S3.1 S3.7 S4.1 S4.7 SD1.1 SD1.8 SD1.9 SD1.10 SD1.13 SD1.14 U2.3 U2.7 U3.11 U3.12

## Polygon pours and split planes (outlines as drawn)
GND on Top Layer "GND_L01_P003" (solid, pour order 3): -7.278,32.263 36.478,32.263 36.478,-1.093 36.056,-1.515 -7.4,-1.515 -7.278,-1.393
VDD on Top Layer "VDD_L01_P001" (solid, pour order 1): 18.037,6.822 18.037,3.05 12.788,3.05 12.788,6.822
VCOM on Top Layer "VCOM_L01_P000" (solid, pour order 0): 20.033,6.822 20.033,8.062 20.033,8.302 20.425,8.302 23.712,8.302 23.712,6.822 22.719,6.822
GND on Bottom Layer "GND_L04_P002" (solid, pour order 2): -7.178,32.078 36.578,32.078 36.578,-1.278 36.156,-1.7 -7.3,-1.7 -7.178,-1.578
GND on GND (split plane): 24.282,26.242 24.303,26.22 24.323,26.195 24.338,26.183 24.35,26.17 24.376,26.152 24.401,26.132 24.417,26.123 24.432,26.112 24.461,26.099 24.489,26.084 24.507,26.079 24.524,26.072 24.555,26.065 24.585,26.055 24.603,26.054 24.621,26.049 24.653,26.049 24.684,26.046 28.294,26.046 28.89,25.45 28.89,23 28.899,22.9 28.928,22.805 28.976,22.716 29.039,22.639 31.039,20.639 31.116,20.576 31.205,20.528 31.3,20.499 31.4,20.49 35.29,20.49 35.29,10.41 31.4,10.41 31.3,10.401 31.205,10.372 31.116,10.324 31.039,10.261 29.039,8.261 28.976,8.184 28.928,8.095 28.899,8 28.89,7.9 28.89,5.3 28.3,4.71 26.69,4.71 26.676,4.709 26.662,4.71 26.626,4.704 26.591,4.701 26.577,4.696 26.563,4.694 26.529,4.682 26.495,4.672 26.482,4.665 26.469,4.66 26.438,4.641 26.407,4.624 26.396,4.615 26.383,4.608 26.357,4.584 26.329,4.561 26.32,4.55 26.31,4.54 22.262,0.01 7.128,0.01 3.081,4.54 3.07,4.55 3.061,4.561 3.033,4.584 3.007,4.608 2.995,4.615 2.984,4.624 2.952,4.641 2.921,4.66 2.908,4.665 2.895,4.672 2.861,4.682 2.828,4.694 2.813,4.696 2.8,4.701 2.764,4.704 2.729,4.71 2.714,4.709 2.7,4.71 1.1,4.71 0.51,5.3 0.51,7.9 0.501,8 0.472,8.095 0.424,8.184 0.361,8.261 -1.639,10.261 -1.716,10.324 -1.805,10.372 -1.9,10.401 -2,10.41 -5.89,10.41 -5.89,20.49 -2,20.49 -1.9,20.499 -1.805,20.528 -1.716,20.576 -1.639,20.639 0.361,22.639 0.424,22.716 0.472,22.805 0.501,22.9 0.51,23 0.51,25.45 1.106,26.046 4.7,26.046 4.731,26.049 4.763,26.049 4.781,26.054 4.8,26.055 4.83,26.065 4.861,26.072 4.878,26.079 4.895,26.084 4.923,26.099 4.952,26.112 4.967,26.123 4.984,26.132 5.008,26.152 5.034,26.17 5.047,26.183 5.061,26.195 5.081,26.22 5.103,26.242 8.643,30.79 20.741,30.79
VDD on VDD (split plane): 24.282,26.242 24.303,26.22 24.323,26.195 24.338,26.183 24.35,26.17 24.376,26.152 24.401,26.132 24.417,26.123 24.432,26.112 24.461,26.099 24.489,26.084 24.507,26.079 24.524,26.072 24.555,26.065 24.585,26.055 24.603,26.054 24.621,26.049 24.653,26.049 24.684,26.046 28.294,26.046 28.89,25.45 28.89,23 28.899,22.9 28.928,22.805 28.976,22.716 29.039,22.639 31.039,20.639 31.116,20.576 31.205,20.528 31.3,20.499 31.4,20.49 35.29,20.49 35.29,10.41 31.4,10.41 31.3,10.401 31.205,10.372 31.116,10.324 31.039,10.261 29.039,8.261 28.976,8.184 28.928,8.095 28.899,8 28.89,7.9 28.89,5.3 28.3,4.71 26.69,4.71 26.676,4.709 26.662,4.71 26.626,4.704 26.591,4.701 26.577,4.696 26.563,4.694 26.529,4.682 26.495,4.672 26.482,4.665 26.469,4.66 26.438,4.641 26.407,4.624 26.396,4.615 26.383,4.608 26.357,4.584 26.329,4.561 26.32,4.55 26.31,4.54 22.262,0.01 7.128,0.01 3.081,4.54 3.07,4.55 3.061,4.561 3.033,4.584 3.007,4.608 2.995,4.615 2.984,4.624 2.952,4.641 2.921,4.66 2.908,4.665 2.895,4.672 2.861,4.682 2.828,4.694 2.813,4.696 2.8,4.701 2.764,4.704 2.729,4.71 2.714,4.709 2.7,4.71 1.1,4.71 0.51,5.3 0.51,7.9 0.501,8 0.472,8.095 0.424,8.184 0.361,8.261 -1.639,10.261 -1.716,10.324 -1.805,10.372 -1.9,10.401 -2,10.41 -5.89,10.41 -5.89,20.49 -2,20.49 -1.9,20.499 -1.805,20.528 -1.716,20.576 -1.639,20.639 0.361,22.639 0.424,22.716 0.472,22.805 0.501,22.9 0.51,23 0.51,25.45 1.106,26.046 4.7,26.046 4.731,26.049 4.763,26.049 4.781,26.054 4.8,26.055 4.83,26.065 4.861,26.072 4.878,26.079 4.895,26.084 4.923,26.099 4.952,26.112 4.967,26.123 4.984,26.132 5.008,26.152 5.034,26.17 5.047,26.183 5.061,26.195 5.081,26.22 5.103,26.242 8.643,30.79 20.741,30.79

## Silkscreen, mask and mechanical layers (free items; w line width, h text height)
Top Overlay:
  text "Top" at 7.656,28.05 h1
  text "Designed by / Vlad N" at 31.9,10.436 h1 r90
Bottom Overlay:
  text "Bottom" at 6.503,2.754 h1
Mechanical 4:
  lines w0: 0,5.089 0,7.9 -2,9.9 -6.4,9.9 -6.4,21 -2,21 0,23 0,25.661 ; 0,5.089 0.889,4.2 ; 0,5.089 0.889,4.2 ; 0,5.089 0,25.661 ; 0,25.661 0.895,26.556 ; 0,25.661 0.895,26.556 ; 0.889,4.2 2.7,4.2 ; 0.889,4.2 2.7,4.2 ; 0.895,26.556 4.7,26.556 ; 0.895,26.556 4.7,26.556 ; 2.7,4.2 6.9,-0.5 22.49,-0.5 26.69,4.2 28.511,4.2 29.4,5.089 29.4,7.9 31.4,9.9 35.8,9.9 35.8,21 31.4,21 ; 4.7,26.556 8.394,31.3 20.99,31.3 24.684,26.556 28.505,26.556 29.4,25.661 29.4,23 31.4,21 ; 31.4,21 31.4,21
Mechanical 12:
  lines w0.127: 2.7,4.2 0.889,4.2 0,5.089 0,25.661 0.895,26.556 4.7,26.556